# Altium PCB Radio.PcbDoc
Units mm, origin at the board's own origin, x right, y up, seen from the top; angles counter-clockwise.
Board outline 90.63 x 94.46 mm, 2 copper layers (Top Layer, Bottom Layer), stack 0.74 mm thick; 2 components, 5 nets, 126 pads, 7 vias.
Unrouted connection lines stored in the file: 8.
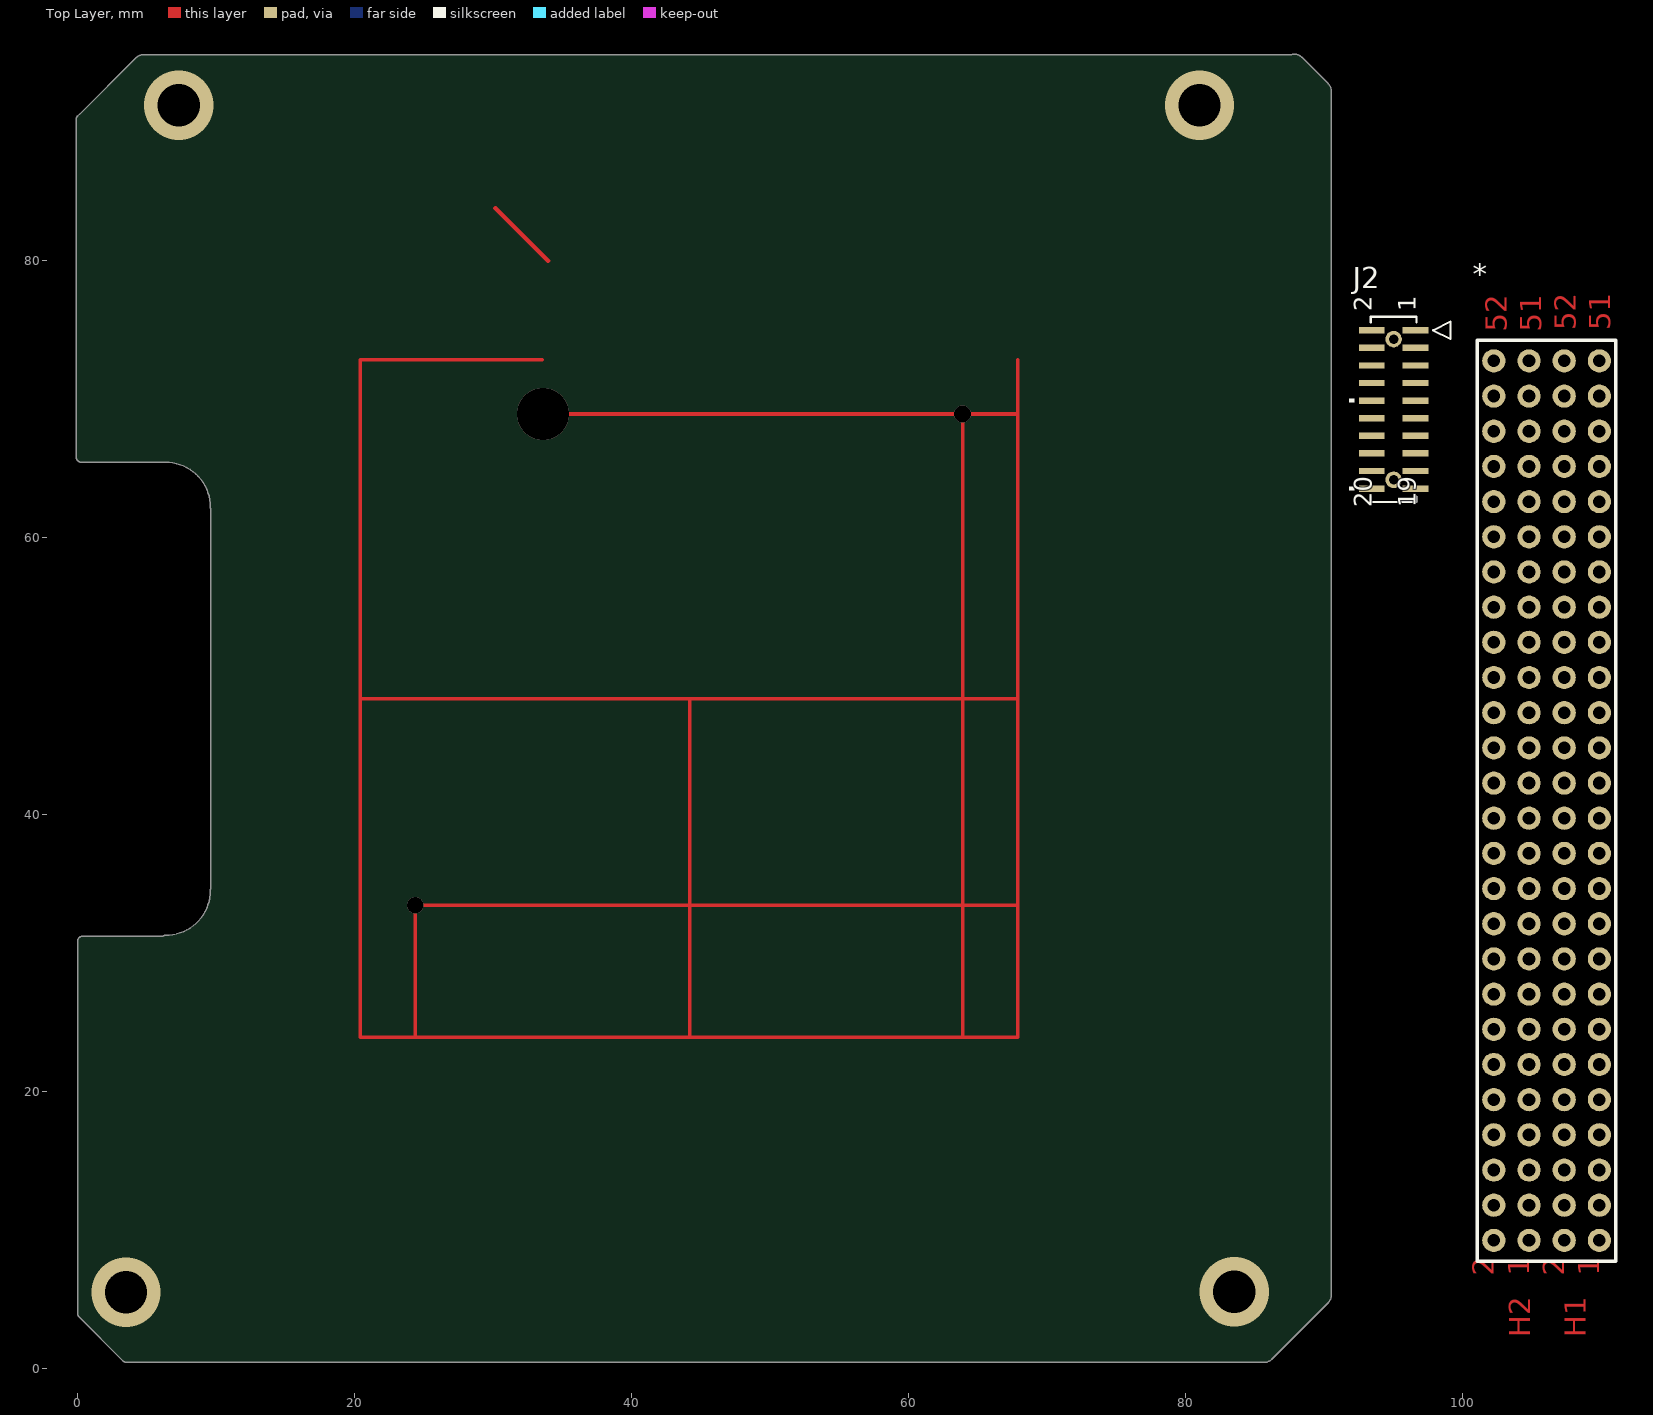
[diagram p0: Top Layer view]
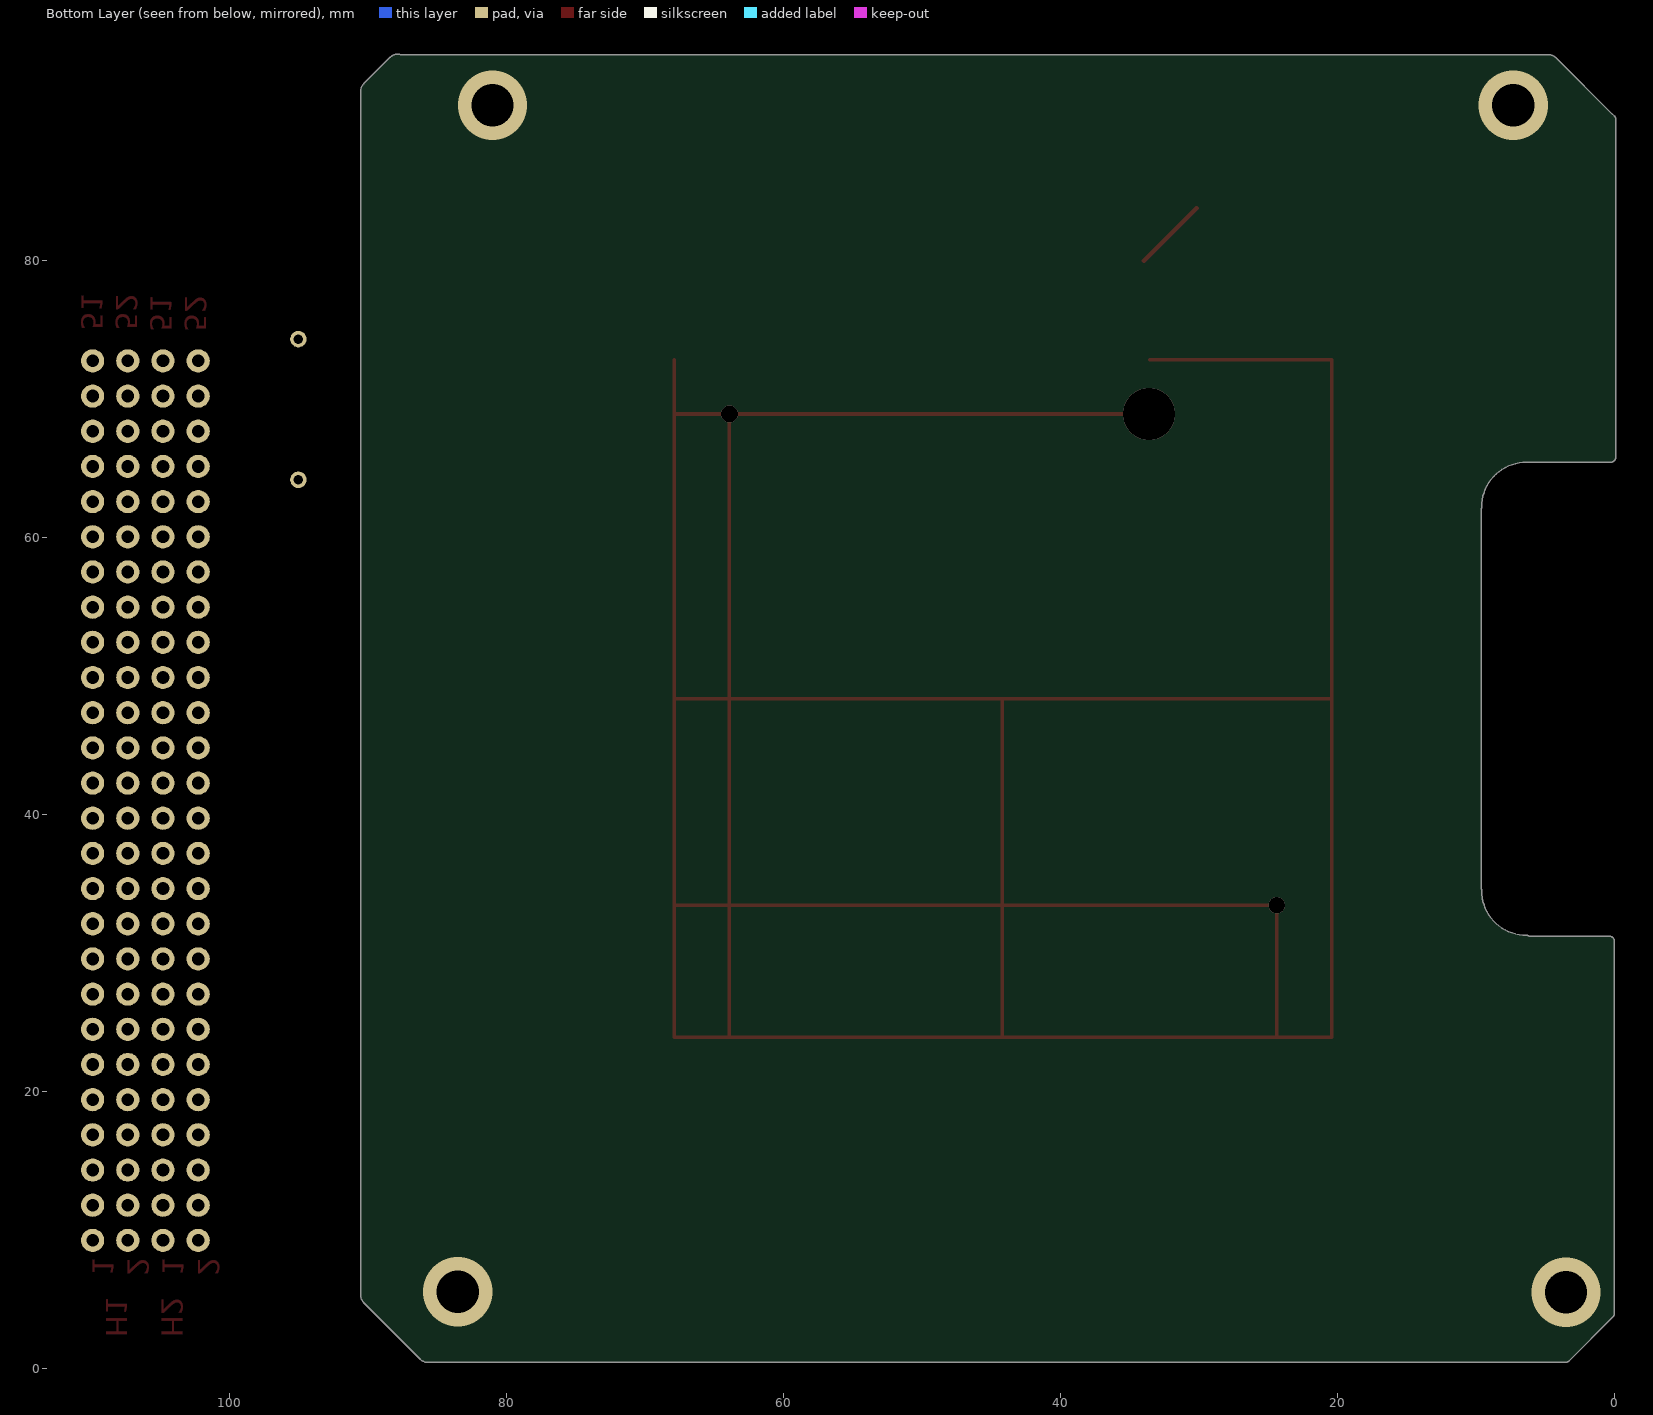
[diagram p1: Bottom Layer view, seen from below]

## Layer stack, top to bottom
Top Solder: solder mask 0.0102, Solder Resist, Dk 3.5
Top Layer: signal copper 0.37
Bottom Layer: signal copper 0.37
Bottom Solder: solder mask 0.0102, Solder Resist, Dk 3.5

## Board outline
0.035,3.947 0.035,30.81 cw(c0.417,30.81) 0.417,31.192 6.185,31.192 cw(c6.375,30.861) 6.376,31.242 ccw(c6.381,34.481) 9.619,34.481 ccw(c6.381,34.481) 9.619,34.498 cw(c10,34.5) 9.652,34.655 9.652,61.992 cw(c10,62.147) 9.619,62.149 ccw(c6.381,62.166) 9.619,62.166 ccw(c6.381,62.166) 6.376,65.405 cw(c6.375,65.786) 6.375,65.405 0.305,65.405 cw(c0.305,65.786) -0.076,65.786 -0.077,89.963 -0.077,90.141 cw(c0.305,90.141) 0.057,90.43 0.157,90.517 4.235,94.595 cw(c4.505,94.325) 4.236,94.595 cw(c4.505,94.325) 4.236,94.595 cw(c4.506,94.326) 4.24,94.599 cw(c4.775,94.056) 4.775,94.819 cw(c4.775,94.437) 4.779,94.819 87.61,94.819 cw(c87.884,94.107) 88.418,94.651 cw(c88.153,94.376) 88.427,94.642 88.425,94.644 ccw(c88.154,94.376) 88.424,94.645 ccw(c87.884,94.107) 88.418,94.651 88.423,94.646 90.328,92.741 90.327,92.742 cw(c89.789,92.202) 90.333,92.736 cw(c89.789,92.202) 90.551,92.202 cw(c90.17,92.202) 90.551,92.198 90.551,5.258 ccw(c90.17,5.258) 90.551,5.262 90.551,5.258 cw(c89.789,5.258) 90.332,4.723 cw(c89.789,5.258) 90.332,4.722 cw(c89.789,5.258) 90.328,4.719 cw(c89.789,5.258) 90.328,4.718 ccw(c90.058,4.988) 90.328,4.719 ccw(c90.058,4.988) 90.332,4.723 90.332,4.722 cw(c90.058,4.988) 90.328,4.719 cw(c90.058,4.988) 90.328,4.718 90.328,4.719 90.328,4.718 cw(c90.058,4.988) 90.327,4.718 90.328,4.718 cw(c89.789,5.258) 90.327,4.718 86.242,0.633 86.239,0.63 ccw(c85.969,0.899) 86.241,0.632 86.242,0.633 cw(c85.969,0.899) 86.235,0.625 ccw(c85.7,1.168) 86.239,0.63 86.235,0.625 cw(c85.7,1.168) 85.706,0.406 cw(c85.7,1.168) 85.7,0.406 ccw(c85.7,0.787) 85.706,0.406 85.7,0.406 3.576,0.406 cw(c3.576,0.787) 3.306,0.518 3.307,0.518 0.157,3.667 cw(c0.417,3.947)

## Design rules (kind name [scope] priority, off if disabled: settings)
Clearance [All] p1: gap=0.254 ignorepadtopadclearanceinfootprint=FALSE except(0: Arc-Hole Track-Hole SMDPad-Hole THPad-Hole Via-Hole Fill-Hole Poly-Hole Region-Hole Text-Hole; 0.127: Track-Track Track-SMDPad Track-THPad SMDPad-SMDPad SMDPad-THPad THPad-THPad)
HoleSize [All] p1: absolutevalues=TRUE maxlimit=3.048 minlimit=0.025 maxpercent=80.000 minpercent=20.000
MinimumSolderMaskSliver [All] p1: minsoldermaskwidth=0.127
PlaneConnect [All] p1: planeconnectstyle=Direct reliefexpansion=0.508 reliefentries=4 reliefconductorwidth=0.254 reliefairgap=0.254
PolygonConnect [All] p1: connectstyle=Direct reliefconductorwidth=0.254 reliefentries=4 polygonreliefangle="90 Angle" airgapwidth=0.254
RoomDefinition Radio [InComponentClass('Radio')] p1: confinementstyle=ConfineIn formatcopy=TRUE lockcomponents=FALSE outline -100,-100 -49.2,-100 -49.2,-74.6 -100,-74.6
RoutingVias [All] p1: holewidth=0.711 width=1.27 viastyle="Through Hole" minholewidth=0.711 minwidth=1.27 maxholewidth=0.711 maxwidth=1.27
SolderMaskExpansion [All] p1: expansion=0.102
Width [All] p1: maxlimit=0.99 minlimit=0.305 preferedwidth=0.33
27 further rules are at their usual default settings.

## Components (designator, comment, footprint, x,y, rotation, side; value= is the part's Value field where it differs from the comment)
* "PC-104" PC-104FOOTPRINT 109.906,9.22 r90 top
J2 "CLP-110-02-L-D" CON20_2X10_DUA_C 95.047,69.215 r90 top value=Value

## Footprints (in the part's own frame and the unit in brackets; to place one, negate y for a bottom-side part, rotate by r counter-clockwise, add the part's x,y. Pads: shape width x height; smd on the part's side, far side on the other; paste and mask are expansions set on the pad)
CON20_2X10_DUA_C [mil]
  rect 18x73 smd paste+0 mask+0: 1(225,-62.5) 2(225,62.5) 3(175,-62.5) 4(175,62.5) 5(125,-62.5) 6(125,62.5) 7(75,-62.5) 8(75,62.5) 9(25,-62.5) 10(25,62.5) 11(-25,-62.5) 12(-25,62.5) 13(-75,-62.5) 14(-75,62.5) 15(-125,-62.5) 16(-125,62.5) 17(-175,-62.5) 18(-175,62.5) 19(-225,-62.5) 20(-225,62.5)
  round 47 / inner round 60 / far side round 47 hole 27: 21(-200,0) 22(200,0)
  silkscreen extent -264,-162 264,126, body extent 0,0 10,10, height 10
PC-104FOOTPRINT [mm]
  round 1.676 hole 0.914 mask+0.076: H1_1(0,0) H1_2(0,2.54) H1_3(2.54,0) H1_4(2.54,2.54) H1_5(5.08,0) H1_6(5.08,2.54) H1_7(7.62,0) H1_8(7.62,2.54) H1_9(10.16,0) H1_10(10.16,2.54) H1_11(12.7,0) H1_12(12.7,2.54) H1_13(15.24,0) H1_14(15.24,2.54) H1_15(17.78,0) H1_16(17.78,2.54) H1_17(20.32,0) H1_18(20.32,2.54) H1_19(22.86,0) H1_20(22.86,2.54) H1_21(25.4,0) H1_22(25.4,2.54) H1_23(27.94,0) H1_24(27.94,2.54) H1_25(30.48,0) H1_26(30.48,2.54) H1_27(33.02,0) H1_28(33.02,2.54) H1_29(35.56,0) H1_30(35.56,2.54) H1_31(38.1,0) H1_32(38.1,2.54) H1_33(40.64,0) H1_34(40.64,2.54) H1_35(43.18,0) H1_36(43.18,2.54) H1_37(45.72,0) H1_38(45.72,2.54) H1_39(48.26,0) H1_40(48.26,2.54) H1_41(50.8,0) H1_42(50.8,2.54) H1_43(53.34,0) H1_44(53.34,2.54) H1_45(55.88,0) H1_46(55.88,2.54) H1_47(58.42,0) H1_48(58.42,2.54) H1_49(60.96,0) H1_50(60.96,2.54) H1_51(63.5,0) H1_52(63.5,2.54) H2_1(0,5.08) H2_2(0,7.62) H2_3(2.54,5.08) H2_4(2.54,7.62) H2_5(5.08,5.08) H2_6(5.08,7.62) H2_7(7.62,5.08) H2_8(7.62,7.62) H2_9(10.16,5.08) H2_10(10.16,7.62) H2_11(12.7,5.08) H2_12(12.7,7.62) H2_13(15.24,5.08) H2_14(15.24,7.62) H2_15(17.78,5.08) H2_16(17.78,7.62) H2_17(20.32,5.08) H2_18(20.32,7.62) H2_19(22.86,5.08) H2_20(22.86,7.62) H2_21(25.4,5.08) H2_22(25.4,7.62) H2_23(27.94,5.08) H2_24(27.94,7.62) H2_25(30.48,5.08) H2_26(30.48,7.62) H2_27(33.02,5.08) H2_28(33.02,7.62) H2_29(35.56,5.08) H2_30(35.56,7.62) H2_31(38.1,5.08) H2_32(38.1,7.62) H2_33(40.64,5.08) H2_34(40.64,7.62) H2_35(43.18,5.08) H2_36(43.18,7.62) H2_37(45.72,5.08) H2_38(45.72,7.62) H2_39(48.26,5.08) H2_40(48.26,7.62) H2_41(50.8,5.08) H2_42(50.8,7.62) H2_43(53.34,5.08) H2_44(53.34,7.62) H2_45(55.88,5.08) H2_46(55.88,7.62) H2_47(58.42,5.08) H2_48(58.42,7.62) H2_49(60.96,5.08) H2_50(60.96,7.62) H2_51(63.5,5.08) H2_52(63.5,7.62)
  silkscreen extent -1.5,-1.19 65,8.81

## Part data
J2: "Imported", Built_By=EMA_UL_Team, C="Copyright (C) 2015 Accelerated Designs. All rights reserved", Manufacturer_Part_Number=CLP-110-02-L-D, RefDes=RefDes, Type=Type, Vendor="Samtec Inc"

## Via types
v1: diameter 5, hole 3.048, Top Layer to Bottom Layer, 4 vias
v2: diameter 1.2, hole 1.2, Top Layer to Bottom Layer, 2 vias
v3: diameter 3.75, hole 3.75, Top Layer to Bottom Layer, 1 vias

## Nets (pads, with @x,y where several pads share a name; then routed paths per layer and width w, separated by ;. In a path a pad name is that pad's centre, name@x,y a point inside that pad or via, vN(x,y) a via of type N, cw(c..) or ccw(c..) an arc to the next point about the centre after c; other vN are vias at no path point)
5V: *.H1_47 J2.1 J2.2
DF_S_RX: *.H1_15 J2.7
DF_S_TX: *.H1_13 J2.6
GND: *.H2_30 *.H2_32 J2.3 J2.4
QuakeEnable: *.H1_14 J2.5
pads on no net: *.H1_1 *.H1_2 *.H1_3 *.H1_4 *.H1_5 *.H1_6 *.H1_7 *.H1_8 *.H1_9 *.H1_10 *.H1_11 *.H1_12 *.H1_16 *.H1_17 *.H1_18 *.H1_19 *.H1_20 *.H1_21 *.H1_22 *.H1_23 *.H1_24 *.H1_25 *.H1_26 *.H1_27 *.H1_28 *.H1_29 *.H1_30 *.H1_31 *.H1_32 *.H1_33 *.H1_34 *.H1_35 *.H1_36 *.H1_37 *.H1_38 *.H1_39 *.H1_40 *.H1_41 *.H1_42 *.H1_43 *.H1_44 *.H1_45 *.H1_46 *.H1_48 *.H1_49 *.H1_50 *.H1_51 *.H1_52 *.H2_1 *.H2_2 *.H2_3 *.H2_4 *.H2_5 *.H2_6 *.H2_7 *.H2_8 *.H2_9 *.H2_10 *.H2_11 *.H2_12 *.H2_13 *.H2_14 *.H2_15 *.H2_16 *.H2_17 *.H2_18 *.H2_19 *.H2_20 *.H2_21 *.H2_22 *.H2_23 *.H2_24 *.H2_25 *.H2_26 *.H2_27 *.H2_28 *.H2_29 *.H2_31 *.H2_33 *.H2_34 *.H2_35 *.H2_36 *.H2_37 *.H2_38 *.H2_39 *.H2_40 *.H2_41 *.H2_42 *.H2_43 *.H2_44 *.H2_45 *.H2_46 *.H2_47 *.H2_48 *.H2_49 *.H2_50 *.H2_51 *.H2_52 J2.8 J2.9 J2.10 J2.11 J2.12 J2.13 J2.14 J2.15 J2.16 J2.17 J2.18 J2.19 J2.20 J2.21 J2.22
copper on no net: | length 367.9
  Top Layer w0.254: 20.445,48.336 44.145,48.336 ; 24.409,23.886 v2@24.409,33.366 ; v2(24.422,33.426) 67.922,33.426 ; 33.574,72.786 20.445,72.786 20.445,40.968 20.445,23.886 67.922,23.886 67.922,72.786 ; v3(33.622,68.886) 48.722,68.886 v2(63.922,68.886) ; 44.221,23.886 44.221,48.336 67.922,48.336 ; 63.922,23.886 v2(63.922,68.886) ; 67.922,68.886 v2(63.922,68.886)
  Top Layer w0.33: 30.201,83.744 33.993,79.952
  other v1: 3.526,5.479 83.546,5.504 7.326,91.179 81.026,91.179

## Silkscreen, mask and mechanical layers (free items; w line width, h text height)
Mechanical 2:
  lines w0.762: -12.497,61.798 44.176,48.329 ; 0.416,90.236 ccw(c0.686,89.967) 0.305,89.967 cw(c0.686,89.967) 0.417,90.237 ; 6.325,30.81 0.417,30.81 0.417,3.947 3.576,0.787 84.506,0.787 85.7,0.787 ; 6.375,30.861 ccw(c6.381,34.481) 10,34.5 ; 10,62.147 ccw(c6.381,62.166) 6.375,65.786 0.305,65.786 0.305,90.141 0.417,90.237 ; 10.033,34.493 10.033,62.027 10.058,62.001 ; 0.417,90.237 4.505,94.325 ; 4.505,94.325 cw(c4.775,94.056) 4.775,94.437 ; 4.506,94.326 cw(c4.775,94.056) 4.775,94.437 ; 4.505,94.325 4.506,94.326 ; 4.775,94.437 4.801,94.437 87.694,94.437 ; 85.7,0.787 ccw(c85.7,1.168) 85.969,0.899 ; 85.7,0.787 ccw(c85.7,1.168) 85.969,0.899 85.969,0.899 ; 85.969,0.899 90.058,4.988 ; 87.694,94.437 cw(c87.884,94.107) 88.153,94.376 88.154,94.376 ; 87.694,94.437 cw(c87.884,94.107) 88.154,94.376 ; 88.154,94.376 90.058,92.472 ; 90.058,4.988 ccw(c89.789,5.258) 90.17,5.258 ; 90.058,4.988 ccw(c89.789,5.258) 90.17,5.258 ; 90.058,4.988 90.058,4.988 ; 90.058,92.472 cw(c89.789,92.202) 90.17,92.202 ; 90.058,92.472 90.058,92.471 cw(c89.789,92.202) 90.17,92.202 ; 90.17,5.258 90.17,91.821 90.17,92.202
Drill Drawing:
  text ".Legend" at 69.215,5.944 h1.52

## Text inside footprints (layer, text, board x,y; h text height)
*: Top Layer "52" at 103.206,74.82 h1.52 r90; Top Layer "51" at 105.706,74.82 h1.52 r90; Top Layer "52" at 108.206,74.92 h1.52 r90; Top Layer "51" at 110.706,74.92 h1.52 r90; Top Layer "2" at 102.286,6.68 h1.52 r90; Top Layer "1" at 104.826,6.68 h1.52 r90; Top Layer "2" at 107.366,6.68 h1.52 r90; Top Layer "1" at 109.906,6.68 h1.52 r90; Top Layer "H2" at 104.906,2.22 h1.52 r90; Top Layer "H1" at 108.906,2.22 h1.52 r90; Mechanical 1 "J1" at 106.012,48.627 h0.76 r90
J2: Top Overlay "19" at 96.634,62.141 h1.27 r90; Top Overlay "20" at 93.459,62.141 h1.27 r90; Top Overlay "1" at 96.634,76.289 h1.27 r90; Top Overlay "2" at 93.459,76.289 h1.27 r90; Dimensions "19" at 96.634,62.141 h1.27 r90; Dimensions "20" at 93.459,62.141 h1.27 r90; Dimensions "1" at 96.634,76.289 h1.27 r90; Dimensions "2" at 93.459,76.289 h1.27 r90